# Altium PCB f429ig.pcbdoc (part 3 of 3)
Units mil, origin at the board's own origin, x right, y up, seen from the top; angles counter-clockwise.
Board outline 8198.65 x 7801.59 mil, 2 copper layers (Top Layer, Bottom Layer); 96 components, 183 nets, 663 pads, 462 vias.
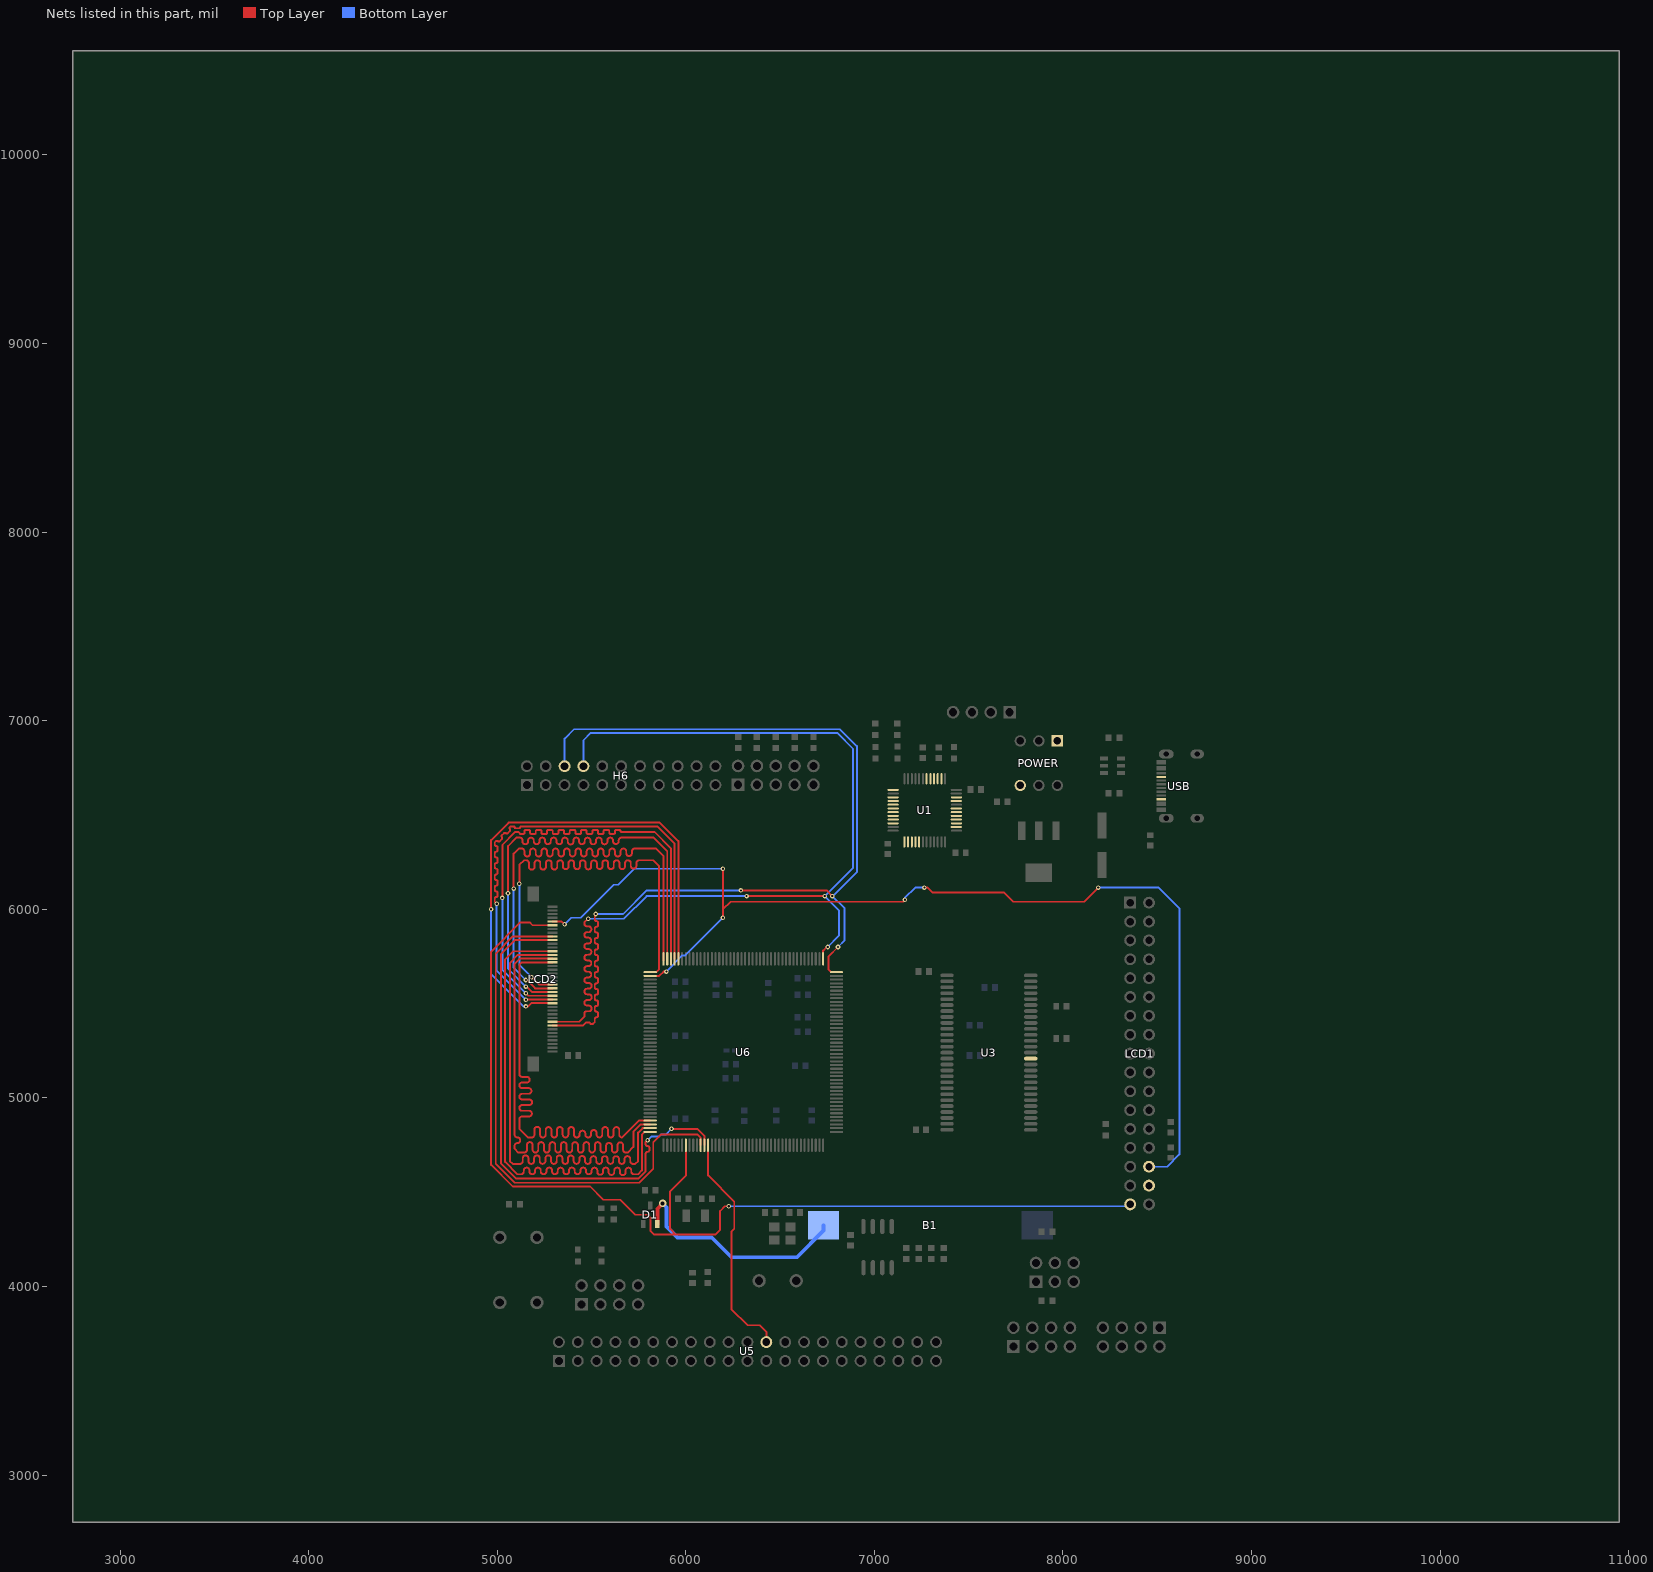
[diagram p3: the nets of this part, all layers, seen from the top]

## Via types
v1: diameter 24, hole 12, Top Layer to Bottom Layer, 383 vias
v2: diameter 40, hole 22, Top Layer to Bottom Layer, 75 vias
v3: diameter 40, hole 25, Top Layer to Bottom Layer, 1 vias
v4: diameter 28, hole 15, Top Layer to Bottom Layer, 1 vias
v5: diameter 30, hole 17, Top Layer to Bottom Layer, 1 vias
v6: diameter 46, hole 24, Top Layer to Bottom Layer, 1 vias

## Nets (pads, with @x,y where several pads share a name; then routed paths per layer and width w, separated by ;. In a path a pad name is that pad's centre, name@x,y a point inside that pad or via, vN(x,y) a via of type N, cw(c..) or ccw(c..) an arc to the next point about the centre after c; other vN are vias at no path point) (continued)
PH11: H6.6 LCD2.8 U6.88 | length 5416.6
  Top Layer w10: LCD2.8@5293.11,5383.94 5456.21,5383.94 5472.53,5400.26 5486.67,5400.26 5494.86,5392.07 5506.93,5392.07 5516.93,5402.07 5516.93,5418.46 cw(c5525.69,5418.46) 5525.69,5427.22 ccw(c5525.69,5435.97) 5534.44,5435.97 5534.44,5448.46 ccw(c5525.69,5448.46) 5525.69,5457.22 cw(c5525.69,5465.97) 5516.93,5465.97 5516.93,5478.46 cw(c5525.69,5478.46) 5525.69,5487.22 ccw(c5525.69,5495.97) 5534.44,5495.97 5534.76,5496.29 5534.76,5508.15 5534.44,5508.46 ccw(c5525.69,5508.46) 5525.69,5517.22 cw(c5525.69,5525.97) 5516.93,5525.97 5516.93,5538.46 cw(c5525.69,5538.46) 5525.69,5547.22 ccw(c5525.69,5555.97) 5534.44,5555.97 5534.44,5568.46 ccw(c5525.69,5568.46) 5525.69,5577.22 cw(c5525.69,5585.97) 5516.93,5585.97 5516.93,5598.46 cw(c5525.69,5598.46) 5525.69,5607.22 ccw(c5525.69,5615.97) 5534.44,5615.97 5534.44,5628.46 ccw(c5525.69,5628.46) 5525.69,5637.22 cw(c5525.69,5645.97) 5516.93,5645.97 5516.93,5658.46 cw(c5525.69,5658.46) 5525.69,5667.22 ccw(c5525.69,5675.97) 5534.44,5675.97 5534.44,5688.46 ccw(c5525.69,5688.46) 5525.69,5697.22 cw(c5525.69,5705.97) 5516.93,5705.97 5516.93,5718.46 cw(c5525.69,5718.46) 5525.69,5727.22 ccw(c5525.69,5735.97) 5534.44,5735.97 5534.44,5748.46 ccw(c5525.69,5748.46) 5525.69,5757.22 cw(c5525.69,5765.97) 5516.93,5765.97 5516.93,5778.46 cw(c5525.69,5778.46) 5525.69,5787.22 ccw(c5525.69,5795.97) 5534.44,5795.97 5534.44,5808.46 ccw(c5525.69,5808.46) 5525.69,5817.22 cw(c5525.69,5825.97) 5516.93,5825.97 5516.93,5838.46 cw(c5525.69,5838.46) 5525.69,5847.22 ccw(c5525.69,5855.97) 5534.44,5855.97 5534.44,5868.46 ccw(c5525.69,5868.46) 5525.69,5877.22 cw(c5525.69,5885.97) 5516.93,5885.97 5516.93,5898.46 cw(c5525.69,5898.46) 5525.69,5907.22 ccw(c5525.69,5915.97) 5534.44,5915.97 5534.44,5928.46 ccw(c5525.69,5928.46) 5525.69,5937.22 cw(c5525.69,5945.97) 5516.93,5945.97 5516.93,5970 v1(5521.93,5975) ; v1(6291.93,6100) 6746.93,6100 v1(6776.93,6070) ; U6.88@6799.06,5666.38 6770.56,5666.38 6756.93,5680 6756.93,5750 v1(6806.93,5800)
  Bottom Layer w10: H6.6@5356.93,6759 5356.93,6905 5406.93,6955 6816.93,6955 6906.93,6865 6906.93,6197.53 6779.41,6070 v1(6776.93,6070) 6841.93,6005 6841.93,5835 v1(6806.93,5800) ; v1(5521.93,5975) 5666.93,5975 5791.93,6100 v1(6291.93,6100)
PH12: H6.8 LCD2.9 U6.89 | length 5272.5
  Top Layer w10: LCD2.9@5293.11,5403.62 5435.55,5403.62 5461.93,5430 5461.93,5448.14 cw(c5472.82,5448.14) 5472.82,5459.03 5485.49,5459.03 ccw(c5485.49,5474.03) 5485.49,5489.03 5476.93,5489.03 cw(c5476.93,5504.03) 5476.93,5519.03 5486.04,5519.03 ccw(c5486.04,5534.03) 5486.04,5549.03 5476.93,5549.03 cw(c5476.93,5564.03) 5476.93,5579.03 5485.22,5579.03 ccw(c5485.22,5594.03) 5485.22,5609.03 5476.93,5609.03 cw(c5476.93,5624.03) 5476.93,5639.03 5483.64,5639.03 ccw(c5483.64,5654.03) 5483.64,5669.03 5476.93,5669.03 cw(c5476.93,5684.03) 5476.93,5699.03 5483.64,5699.03 ccw(c5483.64,5714.03) 5483.64,5729.03 5476.93,5729.03 cw(c5476.93,5744.03) 5476.93,5759.03 5484.05,5759.03 ccw(c5484.05,5774.03) 5484.05,5789.03 5476.93,5789.03 cw(c5476.93,5804.03) 5476.93,5819.03 ccw(c5482.51,5834.03) 5476.93,5849.03 cw(c5476.93,5864.03) 5476.93,5879.03 ccw(c5482.71,5894.03) 5476.93,5909.03 cw(c5476.93,5924.03) 5461.93,5924.03 5461.93,5930 v1(5481.93,5950) ; v1(6321.93,6070) v1(6736.93,6070) ; U6.89@6728.2,5737.24 6728.2,5781.26 6746.93,5800 v1(6751.93,5800)
  Bottom Layer w10: H6.8@5456.93,6759 5456.93,6895 5496.93,6935 6801.93,6935 6886.93,6850 6886.93,6220 v1(6736.93,6070) 6811.93,5995 6811.93,5860 v1(6751.93,5800) ; v1(5481.93,5950) 5671.93,5950 5791.93,6070 v1(6321.93,6070)
PH13: LCD2.14 U6.128 | length 2812.3
  Top Layer w10: v1(4966.93,6000) 4966.93,6367.08 5059.85,6460 5861.93,6460 5960.48,6361.46 U6.128@5960.48,5737.24 ; v1(5151.93,5485) 5163.96,5485 5181.01,5502.05 LCD2.14@5293.11,5502.05
  Bottom Layer w10: v1(4966.93,6000) 4966.93,5655.86 5137.79,5485 v1(5151.93,5485)
PH14: LCD2.15 U6.129 | length 2812.7
  Top Layer w10: v1(4996.93,6030) 4986.93,6040 4986.93,6057.57 cw(c4994.43,6057.57) 4994.43,6065.07 ccw(c4994.43,6072.57) 5001.93,6072.57 5001.93,6087.57 ccw(c4994.43,6087.57) 4994.43,6095.07 cw(c4994.43,6102.57) 4986.93,6102.57 4986.93,6117.57 cw(c4994.43,6117.57) 4994.43,6125.07 ccw(c4994.43,6132.57) 5001.93,6132.57 5001.93,6147.57 ccw(c4994.43,6147.57) 4994.43,6155.07 cw(c4994.43,6162.57) 4986.93,6162.57 4986.93,6177.57 cw(c4994.43,6177.57) 4994.43,6185.07 ccw(c4994.43,6192.57) 5001.93,6192.57 5001.93,6207.57 ccw(c4994.43,6207.57) 4994.43,6215.07 cw(c4994.43,6222.57) 4986.93,6222.57 4986.93,6237.57 cw(c4994.43,6237.57) 4994.43,6245.07 ccw(c4994.43,6252.57) 5001.93,6252.57 5001.93,6267.57 ccw(c4994.43,6267.57) 4994.43,6275.07 cw(c4994.43,6282.57) 4986.93,6282.57 4986.93,6297.57 cw(c4994.43,6297.57) 4994.43,6305.07 ccw(c4994.43,6312.57) 5001.93,6312.57 5001.93,6327.57 ccw(c4994.43,6327.57) 4994.43,6335.07 cw(c4994.43,6342.57) 4986.93,6342.57 4986.93,6355 4993.42,6361.49 cw(c4998.42,6356.49) 5003.42,6361.49 ccw(c5008.42,6366.49) 5013.42,6361.49 5024.63,6372.7 ccw(c5019.63,6377.7) 5024.63,6382.7 cw(c5029.63,6387.7) 5024.63,6392.7 5035.85,6403.91 cw(c5040.85,6398.91) 5045.85,6403.91 ccw(c5050.85,6408.91) 5055.85,6403.91 5067.06,6415.13 ccw(c5062.06,6420.13) 5067.06,6425.13 cw(c5072.06,6430.13) 5067.06,6435.13 5071.93,6440 5086.65,6440 cw(c5086.65,6435) 5091.65,6435 ccw(c5096.65,6435) 5096.65,6430 5116.65,6430 ccw(c5116.65,6435) 5121.65,6435 cw(c5126.65,6435) 5126.65,6440 5849.12,6440 5940.8,6348.32 U6.129@5940.8,5737.24 ; v1(5151.93,5520) 5153.66,5521.73 LCD2.15@5293.11,5521.73
  Bottom Layer w10: v1(4996.93,6030) 4996.93,5675 v1(5151.93,5520)
PH15: LCD2.16 U6.130 | length 2812.7
  Top Layer w10: v1(5026.93,6060) 5026.93,6340.88 5096.06,6410 5111.93,6410 5119.13,6402.8 5119.13,6400 5139.13,6400 ccw(c5139.13,6405) 5144.13,6405 5144.13,6415 cw(c5149.13,6415) 5149.13,6420 5169.13,6420 cw(c5169.13,6415) 5174.13,6415 5174.13,6405 ccw(c5179.13,6405) 5179.13,6400 5199.13,6400 ccw(c5199.13,6405) 5204.13,6405 5204.13,6415 cw(c5209.13,6415) 5209.13,6420 5229.13,6420 cw(c5229.13,6415) 5234.13,6415 5234.13,6405 ccw(c5239.13,6405) 5239.13,6400 5259.13,6400 ccw(c5259.13,6405) 5264.13,6405 5264.13,6415 cw(c5269.13,6415) 5269.13,6420 5289.13,6420 cw(c5289.13,6415) 5294.13,6415 5294.13,6405 ccw(c5299.13,6405) 5299.13,6400 5319.13,6400 ccw(c5319.13,6405) 5324.13,6405 5324.13,6415 cw(c5329.13,6415) 5329.13,6420 5349.13,6420 cw(c5349.13,6415) 5354.13,6415 5354.13,6405 ccw(c5359.13,6405) 5359.13,6400 5379.13,6400 ccw(c5379.13,6405) 5384.13,6405 5384.13,6415 cw(c5389.13,6415) 5389.13,6420 5409.13,6420 cw(c5409.13,6415) 5414.13,6415 5414.13,6405 ccw(c5419.13,6405) 5419.13,6400 5439.13,6400 ccw(c5439.13,6405) 5444.13,6405 5444.13,6415 cw(c5449.13,6415) 5449.13,6420 5469.13,6420 cw(c5469.13,6415) 5474.13,6415 5474.13,6405 ccw(c5479.13,6405) 5479.13,6400 5499.13,6400 ccw(c5499.13,6405) 5504.13,6405 5504.13,6415 cw(c5509.13,6415) 5509.13,6420 5529.13,6420 cw(c5529.13,6415) 5534.13,6415 5534.13,6405 ccw(c5539.13,6405) 5539.13,6400 5559.13,6400 ccw(c5559.13,6405) 5564.13,6405 5564.13,6415 cw(c5569.13,6415) 5569.13,6420 5589.13,6420 cw(c5589.13,6415) 5594.13,6415 5594.13,6405 ccw(c5599.13,6405) 5599.13,6400 5619.13,6400 ccw(c5619.13,6405) 5624.13,6405 5624.13,6415 cw(c5629.13,6415) 5629.13,6420 5629.49,6420.36 5648.77,6420.36 5649.13,6420 cw(c5649.13,6415) 5654.13,6415 ccw(c5659.13,6415) 5659.13,6410 5833.81,6410 5921.11,6322.7 U6.130@5921.11,5732.24 ; v1(5151.93,5555) 5165.51,5541.42 LCD2.16@5293.11,5541.42
  Bottom Layer w10: v1(5026.93,6060) 5026.93,5680 v1(5151.93,5555)
PI0: LCD2.17 U6.131 | length 2812.8
  Top Layer w10: v1@5056.93,6080 5056.93,6335 5101.93,6380 5118.79,6380 cw(c5118.79,6365) 5133.79,6365 5133.79,6360 ccw(c5148.79,6360) 5163.79,6360 5163.79,6365 cw(c5178.79,6365) 5193.79,6365 5193.79,6360 ccw(c5208.79,6360) 5223.79,6360 5223.79,6365 cw(c5238.79,6365) 5253.79,6365 5253.79,6360 ccw(c5268.79,6360) 5283.79,6360 5283.79,6365 cw(c5298.79,6365) 5313.79,6365 5313.79,6360 ccw(c5328.79,6360) 5343.79,6360 5343.79,6365 cw(c5358.79,6365) 5373.79,6365 5373.79,6358.83 ccw(c5388.79,6358.83) 5403.79,6358.83 5403.79,6365 cw(c5418.79,6365) 5433.79,6365 5433.79,6360 ccw(c5448.79,6360) 5463.79,6360 5463.79,6365 cw(c5478.79,6365) 5493.79,6365 5493.79,6359.56 ccw(c5508.79,6359.56) 5523.79,6359.56 5523.79,6365 cw(c5538.79,6365) 5553.79,6365 5553.79,6359.12 ccw(c5568.79,6359.12) 5583.79,6359.12 5583.79,6365 cw(c5598.79,6365) 5613.79,6365 ccw(c5628.79,6361.36) 5643.79,6365 cw(c5658.79,6365) 5658.79,6380 5828.92,6380 5901.43,6307.5 U6.131@5901.43,5732.24 ; v1(5151.93,5590) 5156.93,5590 5185.83,5561.1 LCD2.17@5293.11,5561.1
  Bottom Layer w10: v1(5056.93,6085) 5056.93,5685 v1(5151.93,5590)
PI1: LCD2.18 U6.132 | length 2812.5
  Top Layer w10: v1(5086.93,6110) 5086.93,6295 5114.06,6322.12 5129.12,6322.12 cw(c5129.12,6307.12) 5144.12,6307.12 5144.12,6295 ccw(c5159.12,6295) 5174.12,6295 5174.12,6307.12 cw(c5189.12,6307.12) 5204.12,6307.12 5204.12,6295 ccw(c5219.12,6295) 5234.12,6295 5234.12,6307.12 cw(c5249.12,6307.12) 5264.12,6307.12 5264.12,6295 ccw(c5279.12,6295) 5294.12,6295 5294.12,6307.12 cw(c5309.12,6307.12) 5324.12,6307.12 5324.12,6295 ccw(c5339.12,6295) 5354.12,6295 5354.12,6307.12 cw(c5369.12,6307.12) 5384.12,6307.12 5384.12,6295 ccw(c5399.12,6295) 5414.12,6295 5414.12,6307.12 cw(c5429.12,6307.12) 5444.12,6307.12 5444.12,6295 ccw(c5459.12,6295) 5474.12,6295 5474.12,6307.12 cw(c5489.12,6307.12) 5504.12,6307.12 5504.12,6295 ccw(c5519.12,6295) 5534.12,6295 5534.12,6307.12 cw(c5549.12,6307.12) 5564.12,6307.12 5564.12,6295 ccw(c5579.12,6295) 5594.12,6295 5594.12,6307.12 cw(c5609.12,6307.12) 5624.12,6307.12 5624.12,6295 ccw(c5639.12,6295) 5654.12,6295 5654.12,6307.12 cw(c5669.12,6307.12) 5684.12,6307.12 5684.12,6297.16 ccw(c5699.12,6297.16) 5714.12,6297.16 5714.12,6307.12 cw(c5729.12,6307.12) 5729.12,6322.12 5841.93,6322.12 5881.74,6282.32 U6.132@5881.74,5729.36 ; v1(5151.93,5625) 5156.93,5625 5201.14,5580.79 LCD2.18@5293.11,5580.79
  Bottom Layer w10: v1(5086.93,6110) 5086.93,5690 v1(5151.93,5625)
PI2: LCD2.19 U6.133 | length 2812.7
  Top Layer w10: v1(5116.93,6135) 5116.93,6235 5141.93,6260 5152.92,6260 cw(c5152.92,6245) 5167.92,6245 5167.92,6225 ccw(c5182.92,6225) 5197.92,6225 5197.92,6245 cw(c5212.92,6245) 5227.92,6245 5227.92,6225 ccw(c5242.92,6225) 5257.92,6225 5257.92,6245 cw(c5272.92,6245) 5287.92,6245 5287.92,6225.44 ccw(c5302.92,6225.44) 5317.92,6225.44 5317.92,6245 cw(c5332.92,6245) 5347.92,6245 5347.92,6227.63 ccw(c5362.92,6227.63) 5377.92,6227.63 5377.92,6245 cw(c5392.92,6245) 5407.92,6245 5407.92,6227.19 ccw(c5422.92,6227.19) 5437.92,6227.19 5437.92,6245 cw(c5452.92,6245) 5467.92,6245 5467.92,6226.75 ccw(c5482.92,6226.75) 5497.92,6226.75 5497.92,6245 cw(c5512.92,6245) 5527.92,6245 5527.92,6228.5 ccw(c5542.92,6228.5) 5557.92,6228.5 5557.92,6245 cw(c5572.92,6245) 5587.92,6245 5587.92,6227.63 ccw(c5602.92,6227.63) 5617.92,6227.63 5617.92,6245 cw(c5632.92,6245) 5647.92,6245 5647.92,6228.06 ccw(c5662.92,6228.06) 5677.92,6228.06 5677.92,6245 cw(c5692.92,6245) 5707.92,6245 5707.92,6230.69 ccw(c5722.92,6230.69) 5737.92,6230.69 5737.92,6245 cw(c5752.92,6245) 5752.92,6260 5826.93,6260 5856.93,6230 5856.93,5680 5843.31,5666.38 U6.133@5810.88,5666.38 ; v1(5181.93,5640) 5221.46,5600.47 LCD2.19@5293.11,5600.47
  Bottom Layer w10: v1(5116.93,6135) 5116.93,5705 v1(5181.93,5640)
PI3: LCD1.30 LCD2.36 U6.134 | length 5879.9
  Top Layer w10: LCD2.36@5293.11,5935.12 5341.81,5935.12 v1(5356.93,5920) ; U6.134@5810.88,5646.69 5858.62,5646.69 5881.93,5670 v1(5896.93,5670) ; v1(6196.93,5955) 6196.93,6000 ; v1(6196.93,6215) 6196.93,6000 ; v1(7161.93,6050) 7151.93,6040 6236.93,6040 6196.93,6000 ; v1(7265.51,6115) 7281.93,6115 7306.93,6090 7686.93,6090 7736.93,6040 8111.93,6040 v1(8186.93,6115)
  Bottom Layer w10: v1(5356.93,5920) 5391.93,5955 5441.93,5955 5616.93,6130 5641.93,6130 5726.93,6215 v1(6196.93,6215) ; v1(5896.93,5670) 5981.93,5755 5996.93,5755 v1(6196.93,5955) ; v1(7161.93,6050) 7161.93,6060 7216.93,6115 v1(7265.51,6115) ; v1(8186.93,6115) 8506.93,6115 8616.93,6005 8616.93,4700 8551.93,4635 LCD1.30@8456.16,4635
PI4: LCD2.25 U6.173 | length 2812.8
  Top Layer w10: LCD2.25@5293.11,5718.58 5130.51,5718.58 5116.93,5705 5116.93,5126.57 ccw(c5131.93,5126.57) 5131.93,5111.57 5156.93,5111.57 cw(c5156.93,5096.57) 5156.93,5081.57 5131.93,5081.57 ccw(c5131.93,5066.57) 5131.93,5051.57 5166.37,5051.57 cw(c5166.37,5036.57) 5166.37,5021.57 5131.93,5021.57 ccw(c5131.93,5006.57) 5131.93,4991.57 5169.51,4991.57 cw(c5169.51,4976.57) 5169.51,4961.57 5131.93,4961.57 ccw(c5131.93,4946.57) 5131.93,4931.57 5168.26,4931.57 cw(c5168.26,4916.57) 5168.26,4901.57 5131.93,4901.57 ccw(c5131.93,4886.57) 5116.93,4886.57 5116.93,4835 5161.93,4790 5181.93,4790 ccw(c5181.93,4805) 5196.93,4805 5196.93,4831.54 cw(c5211.93,4831.54) 5226.93,4831.54 5226.93,4805 ccw(c5241.93,4805) 5256.93,4805 5256.93,4830 cw(c5271.93,4830) 5286.93,4830 5286.93,4805 ccw(c5301.93,4805) 5316.93,4805 5316.93,4830 cw(c5331.93,4830) 5346.93,4830 5346.93,4805 ccw(c5361.93,4805) 5376.93,4805 5376.93,4830 cw(c5391.93,4830) 5406.93,4830 5406.93,4805 ccw(c5421.93,4805) 5436.93,4805 5436.93,4811.13 cw(c5451.93,4811.13) 5466.93,4811.13 5466.93,4805 ccw(c5481.93,4805) 5496.93,4805 5496.93,4814.28 cw(c5511.93,4814.28) 5526.93,4814.28 5526.93,4805 ccw(c5541.93,4805) 5556.93,4805 5556.93,4830 cw(c5571.93,4830) 5586.93,4830 5586.93,4805 ccw(c5601.93,4805) 5616.93,4805 5616.93,4830 cw(c5631.93,4830) 5646.93,4830 5646.93,4805 ccw(c5661.93,4805) 5661.93,4790 5750.91,4878.98 U6.173@5810.88,4878.98
PI5: LCD2.26 U6.174 | length 2812.5
  Top Layer w10: LCD2.26@5293.11,5738.27 5120.2,5738.27 5091.93,5710 5091.93,4805.21 ccw(c5106.93,4805.21) 5106.93,4790.21 cw(c5106.93,4775.21) 5106.93,4760.21 ccw(c5106.93,4745.21) 5091.93,4745.21 5091.93,4730 5111.93,4710 5142.53,4710 ccw(c5142.53,4725) 5157.53,4725 5157.53,4750 cw(c5172.53,4750) 5187.53,4750 5187.53,4725 ccw(c5202.53,4725) 5217.53,4725 5217.53,4750 cw(c5232.53,4750) 5247.53,4750 5247.53,4725 ccw(c5262.53,4725) 5277.53,4725 5277.53,4750 cw(c5292.53,4750) 5307.53,4750 5307.53,4725 ccw(c5322.53,4725) 5337.53,4725 5337.53,4750 cw(c5352.53,4750) 5367.53,4750 5367.53,4725 ccw(c5382.53,4725) 5397.53,4725 5397.53,4750 cw(c5412.53,4750) 5427.53,4750 5427.53,4725 ccw(c5442.53,4725) 5457.53,4725 5457.53,4750 cw(c5472.53,4750) 5487.53,4750 5487.53,4725 ccw(c5502.53,4725) 5517.53,4725 5517.53,4750 cw(c5532.53,4750) 5547.53,4750 5547.53,4725 ccw(c5562.53,4725) 5577.53,4725 5577.53,4746.94 cw(c5592.53,4746.94) 5607.53,4746.94 5607.53,4725 ccw(c5622.53,4725) 5637.53,4725 5637.53,4748.69 cw(c5652.53,4748.69) 5667.53,4748.69 5667.53,4725 ccw(c5682.53,4725) 5682.53,4710 5691.93,4710 5721.93,4740 5721.93,4820 5761.22,4859.29 U6.174@5810.88,4859.29
PI6: LCD2.27 U6.175 | length 2812.5
  Top Layer w10: LCD2.27@5293.11,5757.95 5109.88,5757.95 5066.93,5715 5066.93,4665 5081.93,4650 5120.23,4650 ccw(c5120.23,4665) 5135.23,4665 5135.23,4680 cw(c5150.23,4680) 5165.23,4680 5165.23,4665 ccw(c5180.23,4665) 5195.23,4665 5195.23,4680 cw(c5210.23,4680) 5225.23,4680 5225.23,4665 ccw(c5240.23,4665) 5255.23,4665 5255.23,4680 cw(c5270.23,4680) 5285.23,4680 5285.23,4665 ccw(c5300.23,4665) 5315.23,4665 5315.23,4680 cw(c5330.23,4680) 5345.23,4680 5345.23,4665 ccw(c5360.23,4665) 5375.23,4665 5375.23,4679.12 cw(c5390.23,4679.12) 5405.23,4679.12 5405.23,4665 ccw(c5420.23,4665) 5435.23,4665 5435.23,4676.94 cw(c5450.23,4676.94) 5465.23,4676.94 5465.23,4665 ccw(c5480.23,4665) 5495.23,4665 5495.23,4676.06 cw(c5510.23,4676.06) 5525.23,4676.06 5525.23,4665 ccw(c5540.23,4665) 5555.23,4665 5555.23,4675.62 cw(c5570.23,4675.62) 5585.23,4675.62 5585.23,4665 ccw(c5600.23,4665) 5615.23,4665 5615.23,4675.62 cw(c5630.23,4675.62) 5645.23,4675.62 5645.23,4665 ccw(c5660.23,4665) 5675.23,4665 5675.23,4676.06 cw(c5690.23,4676.06) 5705.23,4676.06 5705.23,4665 ccw(c5720.23,4665) 5720.23,4650 5731.93,4650 5746.93,4665 5746.93,4816.1 5770.44,4839.61 U6.175@5810.88,4839.61
PI7: LCD2.28 U6.176 | length 2812.4
  Top Layer w10: LCD2.28@5293.11,5777.64 5084.57,5777.64 5041.93,5735 5041.93,4660 5107.02,4594.91 5125.63,4594.91 ccw(c5125.63,4609.91) 5140.63,4609.91 5140.63,4615 cw(c5155.63,4615) 5170.63,4615 5170.63,4609.91 ccw(c5185.63,4609.91) 5200.63,4609.91 5200.63,4615 cw(c5215.63,4615) 5230.63,4615 5230.63,4609.91 ccw(c5245.63,4609.91) 5260.63,4609.91 5260.63,4615 cw(c5275.63,4615) 5290.63,4615 5290.63,4609.91 ccw(c5305.63,4609.91) 5320.63,4609.91 5320.63,4615 cw(c5335.63,4615) 5350.63,4615 5350.63,4609.91 ccw(c5365.63,4609.91) 5380.63,4609.91 5380.63,4615 cw(c5395.63,4615) 5410.63,4615 5410.63,4609.91 ccw(c5425.63,4609.91) 5440.63,4609.91 5440.63,4615 cw(c5455.63,4615) 5470.63,4615 5470.63,4609.91 ccw(c5485.63,4609.91) 5500.63,4609.91 5500.63,4615 cw(c5515.63,4615) 5530.63,4615 5530.63,4606.99 ccw(c5545.63,4606.99) 5560.63,4606.99 5560.63,4615 cw(c5575.63,4615) 5590.63,4615 5590.63,4605.83 ccw(c5605.63,4605.83) 5620.63,4605.83 5620.63,4615 cw(c5635.63,4615) 5650.63,4615 5650.63,4604.95 ccw(c5665.63,4604.95) 5680.63,4604.95 5680.63,4615 cw(c5695.63,4615) 5710.63,4615 5710.63,4609.91 ccw(c5725.63,4609.91) 5725.63,4594.91 5746.84,4594.91 5766.93,4615 5766.93,4805 5781.85,4819.92 U6.176@5810.88,4819.92
PI8: LCD1.33 LCD2.35 U6.7 | length 5755.6
  Top Layer w10: LCD2.35@5293.11,5915.43 5186.88,5915.43 5172.31,5930 5121.93,5930 4966.93,5775 4966.93,4645 5081.93,4530 5491.93,4530 5561.93,4460 5651.93,4460 5731.93,4380 5796.93,4380 5811.93,4365 5811.93,4295 5831.93,4275 5946.93,4275 ; U6.7@5999.85,4749.06 5999.85,4587.91 5916.93,4505 5916.93,4305 5946.93,4275 ; v1(6226.93,4425) 6206.93,4425 6181.93,4400 6181.93,4300 6156.93,4275 5946.93,4275
  Bottom Layer w10: v1(6226.93,4425) 8346.16,4425 LCD1.33@8356.16,4435
PI9: LCD2.32 U6.11 | length 2816.2
  Top Layer w10: LCD2.32@5293.11,5856.38 5083.31,5856.38 4991.93,5765 4991.93,4650 5091.93,4550 5751.93,4550 5826.93,4625 5826.93,4764.36 5867.57,4805 6063.08,4805 6078.59,4789.49 U6.11@6078.59,4749.06
PI10: LCD2.31 U6.12 | length 2812.8
  Top Layer w10: LCD2.31@5293.11,5836.69 5093.62,5836.69 5020.43,5763.5 5020.43,4651.5 5099.11,4572.82 5749.76,4572.82 5786.93,4610 5786.93,4703.97 cw(c5796.93,4703.97) 5796.93,4713.97 ccw(c5796.93,4723.97) 5806.93,4723.97 5806.93,4733.97 ccw(c5796.93,4733.97) 5796.93,4743.97 cw(c5796.93,4753.97) 5786.93,4753.97 5786.93,4765 v1(5796.93,4775) ; v1(5924,4835.62) 6061.31,4835.62 6098.28,4798.66 U6.12@6098.28,4749.06
  Bottom Layer w10: v1(5796.93,4775) 5816.93,4795 5856.93,4795 5866.93,4805 5893.38,4805 v1(5924,4835.62)
PI11: U5.24 U6.13 | length 1222.5
  Top Layer w10: U6.13@6117.96,4749.06 6117.96,4588.98 6256.93,4450 6256.93,4304.85 6241.93,4289.85 6241.93,3880 6327.54,3794.39 6392.54,3794.39 6426.93,3760 U5.24@6426.93,3705
VBAT: B1.1 D1.2 | length 1238.3
  Top Layer w20: D1.2@5849.03,4331.38 5849.03,4412.1 v2(5876.93,4440)
  Bottom Layer w20: v2(5876.93,4440) 5896.93,4420 5896.93,4318.56 5955.5,4260 6136.93,4260 6241.93,4155 6588.88,4155 6730.6,4296.72 B1.1@6730.6,4325
"": LCD1.32 POWER.1 POWER.6 U1.2 U1.3 U1.4 U1.5 U1.6 U1.13 U1.15 U1.16 U1.17 U1.18 U1.19 U1.20 U1.21 U1.22 U1.25 U1.26 U1.27 U1.28 U1.29 U1.38 U1.39 U1.40 U1.41 U1.42 U1.43 U1.45 U1.46 U3.40 USB.A8 USB.B8

## Polygon pours and split planes (outlines as drawn)
GND on Top Layer (solid, remove dead copper, pour order 0): 4916.22,3302.28 8794.65,3302.28 8794.65,7180.71 4916.22,7180.71
GND on Bottom Layer (solid, remove dead copper, pour order 1): 4916.22,3302.28 8794.65,3302.28 8794.65,7180.71 4916.22,7180.71
+3.3V on Inner2 (split plane): 4967.88,3920 5013.51,3920 5013.51,3910 4967.88,3910
+3.3V on Inner2 (split plane): 5013.51,3920 5059.14,3920 5059.14,3910 5013.51,3910
+3.3V on Inner2 (split plane): 5008.51,3915 5008.51,3960.63 5018.51,3960.63 5018.51,3915
+3.3V on Inner2 (split plane): 5018.51,3915 5018.51,3869.37 5008.51,3869.37 5008.51,3915
+3.3V on Inner2 (split plane): 7693.27,3786.28 7736.93,3786.28 7736.93,3776.28 7693.27,3776.28
+3.3V on Inner2 (split plane): 7736.93,3786.28 7780.6,3786.28 7780.6,3776.28 7736.93,3776.28
+3.3V on Inner2 (split plane): 7731.93,3781.28 7731.93,3824.95 7741.93,3824.95 7741.93,3781.28
+3.3V on Inner2 (split plane): 7741.93,3781.28 7741.93,3737.62 7731.93,3737.62 7731.93,3781.28
+3.3V on Inner2 (split plane): 7793.27,3786.28 7836.93,3786.28 7836.93,3776.28 7793.27,3776.28
+3.3V on Inner2 (split plane): 7836.93,3786.28 7880.6,3786.28 7880.6,3776.28 7836.93,3776.28
+3.3V on Inner2 (split plane): 7831.93,3781.28 7831.93,3824.95 7841.93,3824.95 7841.93,3781.28
+3.3V on Inner2 (split plane): 7841.93,3781.28 7841.93,3737.62 7831.93,3737.62 7831.93,3781.28
+3.3V on Inner2 (split plane): 7893.27,3786.28 7936.93,3786.28 7936.93,3776.28 7893.27,3776.28
+3.3V on Inner2 (split plane): 7936.93,3786.28 7980.6,3786.28 7980.6,3776.28 7936.93,3776.28
+3.3V on Inner2 (split plane): 7931.93,3781.28 7931.93,3824.95 7941.93,3824.95 7941.93,3781.28
+3.3V on Inner2 (split plane): 7941.93,3781.28 7941.93,3737.62 7931.93,3737.62 7931.93,3781.28
+3.3V on Inner2 (split plane): 7813.27,4030 7856.93,4030 7856.93,4020 7813.27,4020
+3.3V on Inner2 (split plane): 7856.93,4030 7900.6,4030 7900.6,4020 7856.93,4020
+3.3V on Inner2 (split plane): 7851.93,4025 7851.93,4068.66 7861.93,4068.66 7861.93,4025
+3.3V on Inner2 (split plane): 7861.93,4025 7861.93,3981.34 7851.93,3981.34 7851.93,4025
+3.3V on Inner2 (split plane): 7813.27,4130 7856.93,4130 7856.93,4120 7813.27,4120
+3.3V on Inner2 (split plane): 7856.93,4130 7900.6,4130 7900.6,4120 7856.93,4120
+3.3V on Inner2 (split plane): 7851.93,4125 7851.93,4168.66 7861.93,4168.66 7861.93,4125
+3.3V on Inner2 (split plane): 7861.93,4125 7861.93,4081.34 7851.93,4081.34 7851.93,4125
+3.3V on Inner2 (split plane): 7417.21,7050 7460.87,7050 7460.87,7040 7417.21,7040
+3.3V on Inner2 (split plane): 7373.54,7050 7417.21,7050 7417.21,7040 7373.54,7040
+3.3V on Inner2 (split plane): 7422.21,7045 7422.21,7001.34 7412.21,7001.34 7412.21,7045
+3.3V on Inner2 (split plane): 7412.21,7045 7412.21,7088.66 7422.21,7088.66 7422.21,7045
+3.3V on Inner2 (split plane): 8351.16,4835 8351.16,4876.7 8361.16,4876.7 8361.16,4835
+3.3V on Inner2 (split plane): 8361.16,4835 8361.16,4793.3 8351.16,4793.3 8351.16,4835
+3.3V on Inner2 (split plane): 8356.16,4840 8397.86,4840 8397.86,4830 8356.16,4830
+3.3V on Inner2 (split plane): 8314.46,4840 8356.16,4840 8356.16,4830 8314.46,4830
+3.3V on Inner2 (split plane): 7993.27,3786.28 8036.93,3786.28 8036.93,3776.28 7993.27,3776.28
+3.3V on Inner2 (split plane): 8036.93,3786.28 8080.6,3786.28 8080.6,3776.28 8036.93,3776.28
+3.3V on Inner2 (split plane): 8031.93,3781.28 8031.93,3824.95 8041.93,3824.95 8041.93,3781.28
+3.3V on Inner2 (split plane): 8041.93,3781.28 8041.93,3737.62 8031.93,3737.62 8031.93,3781.28
+5V on Inner2 (split plane): 7970.36,6661.89 8010.56,6661.89 8010.56,6651.89 7970.36,6651.89
+5V on Inner2 (split plane): 7930.16,6661.89 7970.36,6661.89 7970.36,6651.89 7930.16,6651.89
+5V on Inner2 (split plane): 7975.36,6656.89 7975.36,6616.69 7965.36,6616.69 7965.36,6656.89
+5V on Inner2 (split plane): 7965.36,6656.89 7965.36,6697.09 7975.36,6697.09 7975.36,6656.89
+5V on Inner2 (split plane): 7773.51,6898.11 7813.71,6898.11 7813.71,6888.11 7773.51,6888.11
+5V on Inner2 (split plane): 7733.31,6898.11 7773.51,6898.11 7773.51,6888.11 7733.31,6888.11
+5V on Inner2 (split plane): 7778.51,6893.11 7778.51,6852.91 7768.51,6852.91 7768.51,6893.11
+5V on Inner2 (split plane): 7768.51,6893.11 7768.51,6933.31 7778.51,6933.31 7778.51,6893.11
+5V on Inner2 (split plane): 8511.62,3686.28 8555.28,3686.28 8555.28,3676.28 8511.62,3676.28
+5V on Inner2 (split plane): 8467.95,3686.28 8511.62,3686.28 8511.62,3676.28 8467.95,3676.28
+5V on Inner2 (split plane): 8506.62,3637.62 8506.62,3681.28 8516.62,3681.28 8516.62,3637.62
+5V on Inner2 (split plane): 8516.62,3724.95 8516.62,3681.28 8506.62,3681.28 8506.62,3724.95
+5V on Inner2 (split plane): 8211.62,3686.28 8255.28,3686.28 8255.28,3676.28 8211.62,3676.28
+5V on Inner2 (split plane): 8167.95,3686.28 8211.62,3686.28 8211.62,3676.28 8167.95,3676.28
+5V on Inner2 (split plane): 8206.62,3637.62 8206.62,3681.28 8216.62,3681.28 8216.62,3637.62
+5V on Inner2 (split plane): 8216.62,3724.95 8216.62,3681.28 8206.62,3681.28 8206.62,3724.95
+5V on Inner2 (split plane): 8411.62,3686.28 8455.28,3686.28 8455.28,3676.28 8411.62,3676.28
+5V on Inner2 (split plane): 8367.95,3686.28 8411.62,3686.28 8411.62,3676.28 8367.95,3676.28
+5V on Inner2 (split plane): 8406.62,3637.62 8406.62,3681.28 8416.62,3681.28 8416.62,3637.62
+5V on Inner2 (split plane): 8416.62,3724.95 8416.62,3681.28 8406.62,3681.28 8406.62,3724.95
+5V on Inner2 (split plane): 8311.62,3686.28 8355.28,3686.28 8355.28,3676.28 8311.62,3676.28
+5V on Inner2 (split plane): 8267.95,3686.28 8311.62,3686.28 8311.62,3676.28 8267.95,3676.28
+5V on Inner2 (split plane): 8306.62,3637.62 8306.62,3681.28 8316.62,3681.28 8316.62,3637.62
+5V on Inner2 (split plane): 8316.62,3724.95 8316.62,3681.28 8306.62,3681.28 8306.62,3724.95
GND on Inner1 (split plane): 8616.83,3380 ccw(c8808.42,3450.82) 8691.86,3283.09 5017.01,3283.09 ccw(c4900.45,3450.82) 5092.03,3380 ccw(c5041.98,3430.05) 4991.93,3480.1 ccw(c4232.68,4435.63) 4897.03,3411.84 4897.03,7073.05 ccw(c4228.15,6043.03) 4991.94,7004.78 ccw(c5041.99,7054.83) 5092.04,7104.88 ccw(c6667.74,8314.89) 5023.43,7199.9 8687.1,7199.9 ccw(c7663.31,7864.26) 8618.84,7105 ccw(c8668.89,7054.95) 8718.94,7004.9 ccw(c9478.2,6049.37) 8813.84,7073.16 8813.84,3405.08 ccw(c8646.11,3288.52) 8716.93,3480.1 ccw(c8666.88,3430.05)
GND on Inner1 (split plane): 5013.51,4265 5059.14,4265 5059.14,4255 5013.51,4255
GND on Inner1 (split plane): 4967.88,4265 5013.51,4265 5013.51,4255 4967.88,4255
GND on Inner1 (split plane): 5018.51,4260 5018.51,4214.37 5008.51,4214.37 5008.51,4260
GND on Inner1 (split plane): 5008.51,4260 5008.51,4305.63 5018.51,4305.63 5018.51,4260
GND on Inner1 (split plane): 6388.51,4035 6434.14,4035 6434.14,4025 6388.51,4025
GND on Inner1 (split plane): 6342.88,4035 6388.51,4035 6388.51,4025 6342.88,4025
GND on Inner1 (split plane): 6383.51,3984.37 6383.51,4030 6393.51,4030 6393.51,3984.37
GND on Inner1 (split plane): 6393.51,4075.63 6393.51,4030 6383.51,4030 6383.51,4075.63
GND on Inner1 (split plane): 7793.27,3686.28 7836.93,3686.28 7836.93,3676.28 7793.27,3676.28
GND on Inner1 (split plane): 7836.93,3686.28 7880.6,3686.28 7880.6,3676.28 7836.93,3676.28
GND on Inner1 (split plane): 7831.93,3681.28 7831.93,3724.95 7841.93,3724.95 7841.93,3681.28
GND on Inner1 (split plane): 7841.93,3681.28 7841.93,3637.62 7831.93,3637.62 7831.93,3681.28
GND on Inner1 (split plane): 7717.21,7050 7760.87,7050 7760.87,7040 7717.21,7040
GND on Inner1 (split plane): 7673.54,7050 7717.21,7050 7717.21,7040 7673.54,7040
GND on Inner1 (split plane): 7722.21,7045 7722.21,7001.34 7712.21,7001.34 7712.21,7045
GND on Inner1 (split plane): 7712.21,7045 7712.21,7088.66 7722.21,7088.66 7722.21,7045
GND on Inner1 (split plane): 7693.27,3686.28 7736.93,3686.28 7736.93,3676.28 7693.27,3676.28
GND on Inner1 (split plane): 7736.93,3686.28 7780.6,3686.28 7780.6,3676.28 7736.93,3676.28
GND on Inner1 (split plane): 7731.93,3681.28 7731.93,3724.95 7741.93,3724.95 7741.93,3681.28
GND on Inner1 (split plane): 7741.93,3681.28 7741.93,3637.62 7731.93,3637.62 7731.93,3681.28
GND on Inner1 (split plane): 7993.27,3686.28 8036.93,3686.28 8036.93,3676.28 7993.27,3676.28
GND on Inner1 (split plane): 8036.93,3686.28 8080.6,3686.28 8080.6,3676.28 8036.93,3676.28
GND on Inner1 (split plane): 8031.93,3681.28 8031.93,3724.95 8041.93,3724.95 8041.93,3681.28
GND on Inner1 (split plane): 8041.93,3681.28 8041.93,3637.62 8031.93,3637.62 8031.93,3681.28
GND on Inner1 (split plane): 7893.27,3686.28 7936.93,3686.28 7936.93,3676.28 7893.27,3676.28
GND on Inner1 (split plane): 7936.93,3686.28 7980.6,3686.28 7980.6,3676.28 7936.93,3676.28
GND on Inner1 (split plane): 7931.93,3681.28 7931.93,3724.95 7941.93,3724.95 7941.93,3681.28
GND on Inner1 (split plane): 7941.93,3681.28 7941.93,3637.62 7931.93,3637.62 7931.93,3681.28
GND on Inner1 (split plane): 8351.16,4735 8351.16,4776.7 8361.16,4776.7 8361.16,4735
GND on Inner1 (split plane): 8361.16,4735 8361.16,4693.3 8351.16,4693.3 8351.16,4735
GND on Inner1 (split plane): 8356.16,4740 8397.86,4740 8397.86,4730 8356.16,4730
GND on Inner1 (split plane): 8314.46,4740 8356.16,4740 8356.16,4730 8314.46,4730
GND on Inner1 (split plane): 8451.16,4835 8451.16,4876.7 8461.16,4876.7 8461.16,4835
GND on Inner1 (split plane): 8461.16,4835 8461.16,4793.3 8451.16,4793.3 8451.16,4835
GND on Inner1 (split plane): 8456.16,4840 8497.86,4840 8497.86,4830 8456.16,4830
GND on Inner1 (split plane): 8414.46,4840 8456.16,4840 8456.16,4830 8414.46,4830
GND on Inner1 (split plane): 8411.62,3786.28 8455.28,3786.28 8455.28,3776.28 8411.62,3776.28
GND on Inner1 (split plane): 8367.95,3786.28 8411.62,3786.28 8411.62,3776.28 8367.95,3776.28
GND on Inner1 (split plane): 8406.62,3737.62 8406.62,3781.28 8416.62,3781.28 8416.62,3737.62
GND on Inner1 (split plane): 8416.62,3824.95 8416.62,3781.28 8406.62,3781.28 8406.62,3824.95
GND on Inner1 (split plane): 8311.62,3786.28 8355.28,3786.28 8355.28,3776.28 8311.62,3776.28
GND on Inner1 (split plane): 8267.95,3786.28 8311.62,3786.28 8311.62,3776.28 8267.95,3776.28
GND on Inner1 (split plane): 8306.62,3737.62 8306.62,3781.28 8316.62,3781.28 8316.62,3737.62
GND on Inner1 (split plane): 8316.62,3824.95 8316.62,3781.28 8306.62,3781.28 8306.62,3824.95
GND on Inner1 (split plane): 8211.62,3786.28 8255.28,3786.28 8255.28,3776.28 8211.62,3776.28
GND on Inner1 (split plane): 8167.95,3786.28 8211.62,3786.28 8211.62,3776.28 8167.95,3776.28
GND on Inner1 (split plane): 8206.62,3737.62 8206.62,3781.28 8216.62,3781.28 8216.62,3737.62
GND on Inner1 (split plane): 8216.62,3824.95 8216.62,3781.28 8206.62,3781.28 8206.62,3824.95
GND on Inner1 (split plane): 8511.62,3786.28 8555.28,3786.28 8555.28,3776.28 8511.62,3776.28
GND on Inner1 (split plane): 8467.95,3786.28 8511.62,3786.28 8511.62,3776.28 8467.95,3776.28
GND on Inner1 (split plane): 8506.62,3737.62 8506.62,3781.28 8516.62,3781.28 8516.62,3737.62
GND on Inner1 (split plane): 8516.62,3824.95 8516.62,3781.28 8506.62,3781.28 8506.62,3824.95
GND on Inner1 (split plane): 8013.27,4030 8056.93,4030 8056.93,4020 8013.27,4020
GND on Inner1 (split plane): 8056.93,4030 8100.6,4030 8100.6,4020 8056.93,4020
GND on Inner1 (split plane): 8051.93,4025 8051.93,4068.66 8061.93,4068.66 8061.93,4025
GND on Inner1 (split plane): 8061.93,4025 8061.93,3981.34 8051.93,3981.34 8051.93,4025
GND on Inner1 (split plane): 8013.27,4130 8056.93,4130 8056.93,4120 8013.27,4120
GND on Inner1 (split plane): 8056.93,4130 8100.6,4130 8100.6,4120 8056.93,4120
GND on Inner1 (split plane): 8051.93,4125 8051.93,4168.66 8061.93,4168.66 8061.93,4125
GND on Inner1 (split plane): 8061.93,4125 8061.93,4081.34 8051.93,4081.34 8051.93,4125
GND on Inner1 (split plane): 8552.44,6482.9 8552.44,6449.08 8542.44,6449.08 8542.44,6482.9
GND on Inner1 (split plane): 8542.44,6482.9 8542.44,6516.72 8552.44,6516.72 8552.44,6482.9
GND on Inner1 (split plane): 8497.87,6487.9 8547.44,6487.9 8547.44,6477.9 8497.87,6477.9
GND on Inner1 (split plane): 8547.44,6487.9 8597.01,6487.9 8597.01,6477.9 8547.44,6477.9
GND on Inner1 (split plane): 8552.44,6823.06 8552.44,6789.24 8542.44,6789.24 8542.44,6823.06
GND on Inner1 (split plane): 8542.44,6823.06 8542.44,6856.88 8552.44,6856.88 8552.44,6823.06
GND on Inner1 (split plane): 8497.87,6828.06 8547.44,6828.06 8547.44,6818.06 8497.87,6818.06
GND on Inner1 (split plane): 8547.44,6828.06 8597.01,6828.06 8597.01,6818.06 8547.44,6818.06
GND on Inner1 (split plane): 8451.16,5035 8451.16,5076.7 8461.16,5076.7 8461.16,5035
GND on Inner1 (split plane): 8461.16,5035 8461.16,4993.3 8451.16,4993.3 8451.16,5035
GND on Inner1 (split plane): 8456.16,5040 8497.86,5040 8497.86,5030 8456.16,5030
GND on Inner1 (split plane): 8414.46,5040 8456.16,5040 8456.16,5030 8414.46,5030
GND on Inner1 (split plane): 8717.01,6823.06 8717.01,6789.24 8707.01,6789.24 8707.01,6823.06
GND on Inner1 (split plane): 8707.01,6823.06 8707.01,6856.88 8717.01,6856.88 8717.01,6823.06
GND on Inner1 (split plane): 8666.38,6828.06 8712.01,6828.06 8712.01,6818.06 8666.38,6818.06
GND on Inner1 (split plane): 8712.01,6828.06 8757.65,6828.06 8757.65,6818.06 8712.01,6818.06
GND on Inner1 (split plane): 8717.01,6482.9 8717.01,6449.08 8707.01,6449.08 8707.01,6482.9
GND on Inner1 (split plane): 8707.01,6482.9 8707.01,6516.72 8717.01,6516.72 8717.01,6482.9
GND on Inner1 (split plane): 8666.38,6487.9 8712.01,6487.9 8712.01,6477.9 8666.38,6477.9
GND on Inner1 (split plane): 8712.01,6487.9 8757.65,6487.9 8757.65,6477.9 8712.01,6477.9

## Keep-outs
Inner2:
  region net "": 7461.93,5395 ccw(c7441.93,5395) 7421.93,5395 ccw(c7441.93,5395)
  region net "": 7460.24,5240 ccw(c7440.24,5240) 7420.24,5240 ccw(c7440.24,5240)
  region net "": 7456.93,5590 ccw(c7436.93,5590) 7416.93,5590 ccw(c7436.93,5590)
  region net "": 6706.93,5674.41 ccw(c6686.93,5674.41) 6666.93,5674.41 ccw(c6686.93,5674.41)
  region net "": 6481.93,5665 ccw(c6461.93,5665) 6441.93,5665 ccw(c6461.93,5665)
  region net "": 6236.93,5660 ccw(c6216.93,5660) 6196.93,5660 ccw(c6216.93,5660)
  region net "": 5996.93,5670 ccw(c5976.93,5670) 5956.93,5670 ccw(c5976.93,5670)
  region net "": 5906.93,5590 ccw(c5886.93,5590) 5866.93,5590 ccw(c5886.93,5590)
  region net "": 5901.93,5340 ccw(c5881.93,5340) 5861.93,5340 ccw(c5881.93,5340)
  region net "": 5916.93,5165 ccw(c5896.93,5165) 5876.93,5165 ccw(c5896.93,5165)
  region net "": 5911.93,4895 ccw(c5891.93,4895) 5871.93,4895 ccw(c5891.93,4895)
  region net "": 6177.33,4824.61 ccw(c6157.33,4824.61) 6137.33,4824.61 ccw(c6157.33,4824.61)
  region net "": 6336.93,4825 ccw(c6316.93,4825) 6296.93,4825 ccw(c6316.93,4825)
  region net "": 6591.93,4825 ccw(c6571.93,4825) 6551.93,4825 ccw(c6571.93,4825)
  region net "": 6746.93,4895 ccw(c6726.93,4895) 6706.93,4895 ccw(c6726.93,4895)
  region net "": 6711.93,5115 ccw(c6691.93,5115) 6671.93,5115 ccw(c6691.93,5115)
  region net "": 6741.93,5350 ccw(c6721.93,5350) 6701.93,5350 ccw(c6721.93,5350)
  region net "": 6731.93,5560 ccw(c6711.93,5560) 6691.93,5560 ccw(c6711.93,5560)
  region net "": 8496.93,4935 ccw(c8456.16,4935) 8415.39,4935 ccw(c8456.16,4935)
Board Outline Layer:
  lines w10 net "": 4886.93,3372.99 ccw(c4986.93,3372.99) 4986.93,3272.99 8723.94,3272.99 ccw(c8723.94,3372.99) 8823.94,3372.99 8823.94,7110 ccw(c8723.94,7110) 8723.94,7210 4986.93,7210 ccw(c4986.93,7110) 4886.93,7110 4886.93,3372.99
Multi-Layer:
  region net "": 8818.94,7105 ccw(c8718.94,7105) 8618.94,7105 ccw(c8718.94,7105)
  region net "": 5091.94,7104.88 ccw(c4991.94,7104.88) 4891.94,7104.88 ccw(c4991.94,7104.88)
  region net "": 5091.93,3380 ccw(c4991.93,3380) 4891.93,3380 ccw(c4991.93,3380)
  region net "": 8816.93,3380 ccw(c8716.93,3380) 8616.93,3380 ccw(c8716.93,3380)

## Other copper
Inner2 (plane layer: these items are gaps in the copper):
  lines w25 net "": 5086.37,3540.57 5086.37,5096.85 5259.52,5270 5496.93,5270 5562.42,5204.51 5562.42,5100 5281.93,4819.51 5281.93,3535 7426.93,3535 7481.93,3590 8066.93,3590 8131.93,3655 8131.93,3955 8616.93,4440 8616.93,5099.63 8121.93,5595 8121.93,5775 7581.93,6315 7581.93,6960 7602.47,6980.53 7995.79,6980.53 8046.93,6929.4 8046.93,6625 7962.48,6540.55 7962.48,6353.45 7990.93,6325 8481.93,6325 8766.93,6040 8766.93,3805 8296.93,3335 5291.93,3335 5086.37,3540.57

## Silkscreen, mask and mechanical layers (free items; w line width, h text height)
Top Silkscreen Layer:
  lines w10 net "": 5331.16,4378 5426.04,4378 ; 5331.16,6117.33 5426.04,6117.33 ; 5425.97,4245 5426.16,4245.19 5426.16,4374.84 ; 5426.16,6120.84 5426.16,6248.15 5428.01,6250 ; 7897.36,7000 7897.36,7095 ; 8025.35,6995 8025.35,7095 ; 8127.92,4075 8499.52,4074.44 ; 8152.36,7000 8152.36,7095 ; 8246.93,3978.14 8246.93,4175 ; 8374.93,3975 8374.93,4175 ; 5331.16,4294.88 ccw(c5381.16,4294.88) 5381.16,4244.88 8531.16,4244.88 ccw(c8531.16,4294.88) 8581.16,4294.88 8581.16,6200 ccw(c8531.16,6200) 8531.16,6250 5381.16,6250 ccw(c5381.16,6200) 5331.16,6200 5331.16,4294.88 ; 7778.35,6995 8272.36,6995 8272.36,7095 7778.35,7095 7778.35,6995 ; 8127.92,3975 8501.55,3975 8501.55,4175 8127.92,4175 8127.92,3975
  lines w12 net "": 8506.16,4244.88 8506.16,4375 8581.16,4375 ; 8506.16,6250 8506.16,6095 8581.16,6095
  text "3V3" at 7789.16,7031.1 h32.45
  text "DIO" at 7924.16,7031.1 h32.45
  text "CLK" at 8044.16,7031.1 h32.45
  text "GND" at 8164.16,7031.1 h32.45
  text "PB14" at 5736.92,6929.43 h29.2 r270
  text "PH12" at 5437.62,6928.23 h29.2 r270
  text "PB12" at 5536.92,6928.23 h29.2 r270
  text "PB13" at 5641.92,6928.23 h29.2 r270
  text "PB15" at 5836.92,6928.23 h29.2 r270
  text "PD12" at 6036.92,6928.23 h29.2 r270
  text "PH11" at 5336.92,6917.23 h29.2 r270
  text "PD11" at 5937.62,6917.23 h29.2 r270
  text "PA9" at 6141.92,6910.34 h29.2 r270
  text "PH9" at 5236.92,6907.84 h29.2 r270
  text "PB11" at 5051.92,6823.78 h29.2 r270
  text "PB10" at 5051.92,6693.78 h29.2 r270
  text "PH10" at 5341.92,6596.21 h29.2 r270
  text "PA12" at 5442.62,6596.21 h29.2 r270
  text "PA11" at 5541.92,6596.21 h29.2 r270
  text "PA10" at 6146.92,6596.21 h29.2 r270
  text "NRST" at 6261.92,6596.21 h29.2 r270
  text "PA14" at 6361.92,6596.21 h29.2 r270
  text "PA13" at 6462.62,6596.21 h29.2 r270
  text "PA10" at 6561.92,6596.21 h29.2 r270
  text "PH8" at 5241.92,6594.93 h29.2 r270
  text "PA8" at 5646.92,6594.93 h29.2 r270
  text "PC9" at 5741.92,6594.93 h29.2 r270
  text "PC8" at 5841.92,6594.93 h29.2 r270
  text "PC7" at 5942.62,6594.93 h29.2 r270
  text "PC6" at 6041.92,6594.93 h29.2 r270
  text "PA9" at 6666.92,6594.93 h29.2 r270
  text "PD13" at 8526.92,6088.78 h29.2 r270
  text "PD7" at 8212.94,6022.49 h29.2
  text "PD4" at 8524.42,5977.49 h29.2 r270
  text "PD5" at 8212.94,5922.49 h29.2
  text "PD14" at 8524.42,5883.26 h29.2 r270
  text "PD0" at 8524.42,5768.56 h29.2 r270
  text "PD15" at 8193.76,5722.49 h29.2
  text "PE7" at 8524.42,5674.25 h29.2 r270
  text "PD1" at 8223.94,5621.78 h29.2
  text "PE9" at 8524.42,5581.13 h29.2 r270
  text "PD15" at 8193.76,5521.06 h29.2
  text "PE11" at 8524.42,5490.5 h29.2 r270
  text "PD1" at 8223.94,5420.35 h29.2
  text "PE13" at 8524.42,5390.48 h29.2 r270
  text "PD15" at 8193.76,5319.63 h29.2
  text "PE15" at 8524.42,5279.47 h29.2 r270
  text "PD1" at 8223.94,5218.92 h29.2
  text "PD9" at 8524.42,5167.17 h29.2 r270
  text "PD15" at 8193.76,5120.11 h29.2
  text "PD1" at 8223.94,5021.3 h29.2
  text "PD1" at 8223.94,4922.49 h29.2
  text "PI3" at 8521.92,4657.49 h29.2 r270
  text "PG3" at 8211.74,4616.3 h29.2
  text "PH7" at 8212.94,4517.49 h29.2
  text "PH6" at 8521.92,4477.49 h29.2 r270
  text "PI8" at 8229.94,4418.68 h29.2
  text "PC13" at 5720.93,4153.6 h29.2 r225
  text "PA0" at 5800.76,4149.7 h29.2 r225
  text "3V3" at 8138.74,4111.1 h32.45
  text "B1" at 8285.16,4111.1 h32.45
  text "GND" at 8391.41,4110.45 h32.45
  text "PB3" at 5399.44,4064.99 h29.2
  text "PB4" at 5499.59,4064.99 h29.2
  text "B0" at 8281.37,4009.49 h32.45
  text "3V3" at 8138.32,4008.47 h32.45
  text "GND" at 8392.66,4007.46 h32.45
  text "PB8" at 5855.76,3864.7 h29.2 r225
  text "PG13" at 5553.99,3856.21 h29.2 r225
  text "PG10" at 5453.63,3853.66 h29.2 r225
  text "PG14" at 5654.35,3853.59 h29.2 r225
  text "PA4" at 7011.39,3853.14 h29.2 r270
  text "PA5" at 6911.74,3851.94 h29.2 r270
  text "PA7" at 7111.03,3851.94 h29.2 r270
  text "PC5" at 7210.67,3850.64 h29.2 r270
  text "3.3V" at 7822.35,3850.8 h29.2
  text "GND" at 8318.6,3850.8 h29.2
  text "PE4" at 6209.96,3849.44 h29.2 r270
  text "PH2" at 6812.1,3849.44 h29.2 r270
  text "PB9" at 5908.89,3848.24 h29.2 r270
  text "PE2" at 6009.24,3848.24 h29.2 r270
  text "PE3" at 6109.6,3848.24 h29.2 r270
  text "PE5" at 6310.32,3848.24 h29.2 r270
  text "PF7" at 6511.03,3848.24 h29.2 r270
  text "PF9" at 6611.39,3847.04 h29.2 r270
  text "PI11" at 6410.67,3840.63 h29.2 r270
  text "PA1" at 6711.74,3840.94 h29.2 r270
  text "PB6" at 5753.8,3839.25 h29.2 r225
  text "PB1" at 7310.32,3838.44 h29.2 r270
  text "PG9" at 5219.42,3756.89 h29.2 r270
  text "PD6" at 5219.42,3636.89 h29.2 r270
  text "GND" at 7838.3,3584.79 h29.2
  text "5V" at 8336.83,3584.79 h29.2
  text "PG10" at 5411.92,3543.68 h29.2 r270
  text "PG13" at 5512.28,3543.68 h29.2 r270
  text "PG14" at 5612.64,3543.68 h29.2 r270
  text "PC12" at 6014.07,3543.68 h29.2 r270
  text "PC11" at 6114.42,3543.68 h29.2 r270
  text "PC10" at 6214.78,3543.68 h29.2 r270
  text "PA15" at 6315.14,3543.68 h29.2 r270
  text "PB6" at 5712.99,3542.39 h29.2 r270
  text "PD3" at 5813.35,3542.39 h29.2 r270
  text "PD2" at 5913.71,3542.39 h29.2 r270
  text "PE6" at 6415.49,3542.39 h29.2 r270
  text "PF6" at 6515.85,3542.39 h29.2 r270
  text "PF8" at 6616.21,3542.39 h29.2 r270
  text "PC1" at 6716.57,3542.39 h29.2 r270
  text "PA2" at 6816.92,3542.39 h29.2 r270
  text "PH3" at 6916.57,3542.39 h29.2 r270
  text "PA3" at 7016.21,3542.39 h29.2 r270
  text "PA6" at 7115.85,3542.39 h29.2 r270
  text "PC4" at 7215.49,3542.39 h29.2 r270
  text "PB0" at 7315.14,3542.39 h29.2 r270
Bottom Silkscreen Layer:
  text "2023/8/27" at 4945.25,6052.98 h45.43 r270
  text "STM32F429IGT6_Moriarty_v1.0" at 4950.85,4826.49 h45.43 r270
Mechanical Layer:
  circle w1 net "": c8719.11,7105.13 r62.99
  circle w1 net "": c5426.16,6120 r62.99
  circle w1 net "": c5426.16,4374.84 r62.99
  circle w1 net "": c4992.11,7105.01 r62.99
  circle w1 net "": c4992.11,3380.13 r62.99
  circle w1 net "": c8717.11,3380.13 r62.99